# EAGLE board M_H_ext_sound (EAGLE 9.6.2)
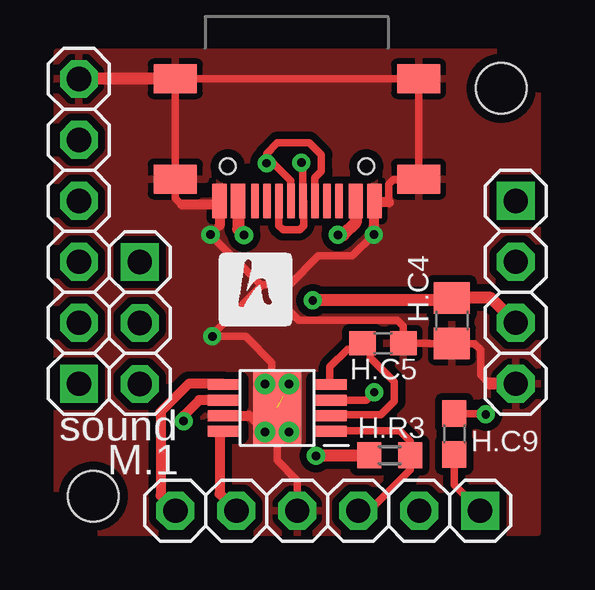
[diagram p0: board, top side]
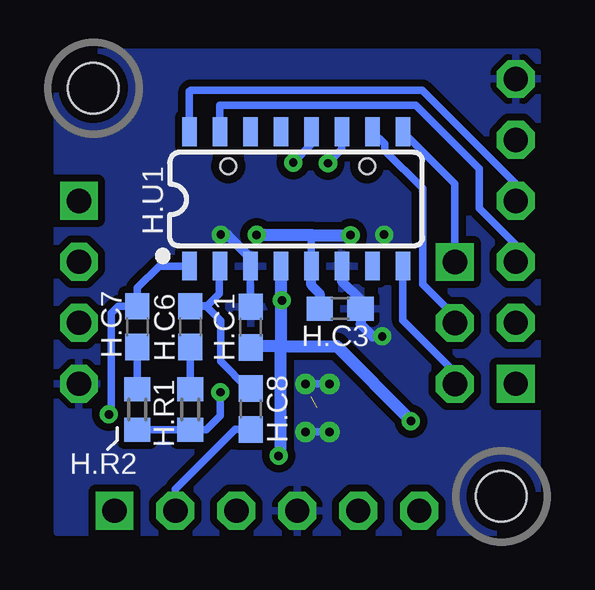
[diagram p1: board, bottom side, seen from below]

No outline drawn. Coordinates in mm, seen from the top.
Copper layers (1*16): Top 0.035mm / dielectric 1.5mm / Bottom 0.035mm
Design rules "default *": minimum track width 12mil, minimum drill 0.35mm, track to track 12mil, track to pad 12mil, pad to pad 10mil, via to via 10mil, smd to smd 10mil, copper to edge 15mil, drill to drill 15mil, minimum pad ring 10mil, minimum via ring 8mil, stop-mask expansion 4mil, vias tented up to drill 0mil, thermal gap 10mil
Holes 2.1 mm at 2,2 19,19

## Footprints (pad centres in the part's own frame; a part is rotated, then mirrored left to right if it is on the bottom)
C0603 = smd 1.1 x 1: 1 -0.85,0; 2 0.85,0
C0805 = smd 1.3 x 1.5: 1 -0.95,0; 2 0.95,0
1X06 = drill 1.016 pad 1.575 square: 1 -6.35,0 | drill 1.016 pad 1.575 octagon: 2 -3.81,0; 3 -1.27,0; 4 1.27,0; 5 3.81,0; 6 6.35,0
R0603 = smd 1 x 1.1: 1 -0.85,0; 2 0.85,0
SO16 = smd 0.6 x 1.2: 1 -4.445,-2.8; 2 -3.175,-2.8; 3 -1.905,-2.8; 4 -0.635,-2.8; 5 0.635,-2.8; 6 1.905,-2.8; 7 3.175,-2.8; 8 4.445,-2.8; 9 4.445,2.8; 10 3.175,2.8; 11 1.905,2.8; 12 0.635,2.8; 13 -0.635,2.8; 14 -1.905,2.8; 15 -3.175,2.8; 16 -4.445,2.8
MSOP-POWERPAD-8 = smd 1.4 x 0.45: 1 -2.184,0.959; 2 -2.184,0.309; 3 -2.184,-0.341; 4 -2.184,-0.991; 5 2.216,-0.991; 6 2.216,-0.341; 7 2.216,0.309; 8 2.216,0.959 | smd 2 x 3: 9 0.016,-0.016 | drill 0.35: P$10 -0.484,-1.016; P$11 0.516,-1.016; P$12 0.516,0.984; P$13 -0.484,0.984
USB-C = smd 0.6 x 1.45: A1B12 -3.235,3.825; A4B9 -2.46,3.825; B1A12 3.215,3.825; B4A9 2.44,3.825 | smd 0.3 x 1.45: A5 -1.26,3.825; A6 -0.26,3.825; A7 0.24,3.825; A8 1.24,3.825; B5 1.74,3.825; B6 0.74,3.825; B7 -0.76,3.825; B8 -1.76,3.825 | smd 1.8 x 1.2: SH1 -5.08,2.91; SH2 -5.08,-1.27; SH3 5.06,-1.27; SH4 5.06,2.91 | hole 0.65: 2.88,2.38; -2.9,2.38
1X03 = drill 1.016 pad 1.575 square: 1 -2.54,0 | drill 1.016 pad 1.575 octagon: 2 0,0; 3 2.54,0
1X04 = drill 1.016 pad 1.575 square: 1 -3.81,0 | drill 1.016 pad 1.575 octagon: 2 -1.27,0; 3 1.27,0; 4 3.81,0

## Placement (x,y rotation side)
H.C1  100n  [C0603]  12.45,9.05 90 bottom
H.C3  1u  [C0603]  8.71,9.81 0 bottom
H.C4  10u (22u)  [C0805]  16.94,9.31 90 top
H.C5  100n  [C0603]  14.07,8.38 180 top
H.C6  100n  [C0603]  14.96,9.07 270 bottom
H.C7  100n  [C0603]  17.17,9.07 270 bottom
H.C8  100n  [C0603]  12.45,5.64 270 bottom
H.C9  100n  [C0603]  17.04,4.6 270 top
H.J1  [1X06]  11.77,1.4 180 top
H.J2  [1X06]  1.4,13.04 90 top
H.R1  100k  [R0603]  14.96,5.61 270 bottom
H.R2  100k  [R0603]  17.17,5.61 270 bottom
H.R3  10k  [R0603]  14.35,3.71 180 top
H.U1  WT2003S  [SO16]  10.55,14.39 0 bottom
H.U2  TPA6211  [MSOP-POWERPAD-8]  9.68,5.66 180 top
H.USB  USB-C  [USB-C]  10.47,18.12 180 top
JP1  [1X03]  3.94,9.22 270 top
JP2  [1X04]  19.6,10.5 270 top

## Library data of the parts
H.C1 H.C3-H.C9 = rcl; SPICEPREFIX: C
H.J1 H.J2 JP1 JP2 = pinhead2
H.R1-H.R3 = rcl; SPICEPREFIX: R
H.U1 = WT2003S
H.U2 H.USB = hugo

## Nets
GND: H.C1.2 H.C3.2 H.C4.1 H.C5.1 H.J1.4 H.J2.6 H.U1.3 H.U1.6 H.U2.7 H.U2.9 H.U2.P$10 H.U2.P$11 H.U2.P$12 H.U2.P$13 H.USB.A1B12 H.USB.B1A12 H.USB.SH1 H.USB.SH2 H.USB.SH3 H.USB.SH4 JP2.4
N$1: H.C8.2 H.J1.2
N$2: H.C9.2 H.J1.1
N$3: H.J1.5 H.U2.8
N$4: H.J2.3 H.U1.15
N$5: H.J2.4 H.U1.16
N$6: H.J1.6 H.U2.5
N$7: H.J1.3 H.R3.1 H.U2.1
N$8: H.U1.10 JP1.2
N$9: H.U1.12 H.USB.A6 H.USB.B6
N$10: H.U1.11 H.USB.A7 H.USB.B7
N$11: H.C3.1 H.U1.5 H.USB.A4B9 H.USB.B4A9
N$12: H.C6.1 H.C8.1 H.U1.2
N$13: H.C7.1 H.C9.1 H.U1.1
N$14: H.R1.2 H.R2.2 H.U2.3
N$15: H.C5.2 H.U2.2 H.U2.4
N$16: H.U1.9 JP1.1
N$17: H.C6.2 H.R1.1
N$18: H.C7.2 H.R2.1
N$19: H.U1.8 JP1.3
VCC: H.C1.1 H.C4.2 H.R3.2 H.U1.4 H.U2.6 JP2.3

## Tracks (layer width: path | path; a pad name or v marks a point on that pad's centre or on a via)
GND  (via drill 0.35)  (1 unrouted)
  Top 0.305: 5.7,14.15 5.42,14.43 H.USB.SH4 H.USB.SH3 H.USB.SH2 H.USB.SH1 15.53,15.19 14.5,15.19 14.32,15.01 14.32,14.25 | v13.69,12.9 13.71,12.92 | H.J2.6 | 7.26,13.28 v6.88,12.9 8.97,10.81 9.05,10.81 | H.C4.1 17.04,8.46 17.04,8.59 | H.C4.1 16.94,8.31 | 13.65,12.9 v13.69,12.9 | v13.69,12.9 12.8,12.01 11.38,12.01 10.18,10.81 10.08,10.81 | 8.49,5.36 H.U2.P$12 9.66,5.18 H.U2.9 9.66,3.49 10.5,2.65 H.J1.4 | 9.92,6.14 9.38,6.68 H.U2.P$11 9.16,6.71 9.44,6.99 9.44,7.57 8.35,8.66 v6.96,8.66 6.96,8.73 9.05,10.81 | H.C4.1 16.03,8.36 16.01,8.38 H.C5.1 14.92,9.09 14.67,9.34 10.55,9.34 10.08,9.81 10.08,10.81 | H.C4.1 17.88,8.36 18.14,8.1 18.14,7.06 18.51,6.69 | 9.05,10.81 10.08,10.81
  Top 0.406: 5.7,14.15 7.11,14.15 H.USB.B1A12 7.26,13.28 | 14.32,14.25 13.76,14.25 H.USB.A1B12 13.71,12.92 | H.U2.7 8.49,5.36
  Top 0.508: H.USB.SH3 H.J2.6 | JP2.4 18.51,6.69
  Bottom 0.305: 12.62,9.73 H.C1.2 H.U1.3 | H.U2.P$10 H.U2.P$11 | H.U2.P$13 H.U2.P$12
  Bottom 0.406: H.U1.6 8.64,10.96 7.87,10.19 H.C3.2 7.87,9.16 7.37,8.66 v6.96,8.66 | H.U1.3 12.45,11.94 13.41,12.9 v13.69,12.9
  pour Top (isolate 0.305): 0.5,20.5 0.5,0.5 20.5,0.5 20.5,20.5
  pour Bottom (isolate 0.305): 0.5,20.5 0.5,0.5 20.5,0.5 20.5,20.5
N$1
  Bottom 0.305: H.J1.2 15.58,2.29 13.08,4.79 H.C8.2
N$2
  Top 0.305: H.C9.2 17.04,2.47 H.J1.1
N$3
  Top 0.406: H.J1.5 7.26,2.1 7.26,4.5 H.U2.8
N$4
  Bottom 0.305: H.U1.15 13.72,18.3 5.57,18.3 2.92,15.66 2.92,14 1.4,12.48 H.J2.3
N$5
  Bottom 0.305: H.U1.16 14.99,18.87 14.95,18.91 5.29,18.91 1.4,15.02 H.J2.4
N$6
  Top 0.406: H.U2.5 7.44,6.68 5.97,6.68 4.8,5.51 4.8,2.04 5.42,1.42 H.J1.6
N$7
  Top 0.305: 12.2,4.71 H.U2.1 11.89,4.73 14.76,4.73 15.2,4.29 H.R3.1 15.2,3.1 13.5,1.4 H.J1.3
N$8
  Bottom 0.305: H.U1.10 6.86,16.68 6.86,16.4 5.28,14.83 5.28,10.84 3.94,9.5 JP1.2
N$9  (via drill 0.35)
  Top 0.305: v10.67,15.9 10.73,15.9 H.USB.A6 10.76,14.27 10.76,13.28 10.59,13.11 9.91,13.11 9.73,13.28 H.USB.B6
  Bottom 0.305: H.U1.12 9.91,16.66 v10.67,15.9
N$10  (via drill 0.35)
  Top 0.305: H.USB.A7 10.23,15.14 9.5,15.88 v9.22,15.88 9.22,16.28 9.68,16.74 10.99,16.74 11.5,16.23 11.5,15.55 11.23,15.28 H.USB.B7
  Bottom 0.305: v9.22,15.88 8.64,16.45 H.U1.11
N$11  (via drill 0.35)
  Top 0.508: H.USB.A4B9 12.94,13.4 12.42,12.89 v12.19,12.89 | H.USB.B4A9 8.04,13.13 v8.28,12.88
  Bottom 0.305: 9.91,11.92 H.U1.5 9.91,12.85 | 9.91,12.85 9.88,12.88 | 9.96,12.89 9.91,12.85
  Bottom 0.406: H.U1.5 9.91,10.79 9.56,10.45 H.C3.1
  Bottom 0.508: v12.19,12.89 10.55,12.89 9.96,12.89 | 9.88,12.88 v8.28,12.88
N$12
  Bottom 0.305: H.U1.2 13.75,11.57 13.75,10.45 14.25,9.94 14.48,9.94 14.45,9.92 | H.C8.1 12.57,6.49 13.7,7.62 13.7,9.32 14.3,9.92 14.45,9.92 | H.C6.1 14.45,9.92
N$13  (via drill 0.35)
  Top 0.305: v18.35,5.41 18.35,5.45 H.C9.1
  Bottom 0.305: H.C7.1 17.17,10.68 16.26,11.59 H.U1.1 | H.C7.1 17.17,9.78 | H.C7.1 17.95,9.92 18.25,9.62 18.25,5.41 v18.35,5.41
N$14  (via drill 0.35)
  Top 0.305: v13.71,6.33 13.38,6 H.U2.3
  Bottom 0.305: H.R2.2 H.R1.2 14.3,4.76 13.71,5.36 v13.71,6.33
N$15
  Top 0.305: H.U2.4 11.86,7.39 12.6,8.13 12.97,8.13 H.C5.2 | H.U2.2 11.9,5.4 13.98,5.4 14.54,5.96 14.54,6.76 13.53,7.77 13.53,8.36 13.25,8.36 H.C5.2 | 13.22,8.05 H.C5.2
N$16
  Bottom 0.305: H.U1.9 3.94,15.03 JP1.1
N$17
  Bottom 0.305: H.C6.2 H.R1.1
N$18
  Bottom 0.305: H.C7.2 H.R2.1
N$19
  Bottom 0.305: H.U1.8 6.1,9.32 3.94,7.16 JP1.3
VCC  (via drill 0.35)
  Top 0.305: H.R3.2 13.61,3.71
  Top 0.406: H.U2.6 6.41,6 5.77,5.36 v5.77,5.13
  Top 0.508: JP2.3 18.57,10.26 H.C4.2 16.84,10.16 v11.14,10.16 | 13.61,3.71 13.59,3.68 v11.28,3.68
  Bottom 0.305: 11.26,8.25 12.4,8.25 H.C1.1
  Bottom 0.508: H.U1.4 11.18,10.32 11.14,10.29 v11.14,10.16 | 11.12,10.13 v11.14,10.16 | v5.77,5.13 5.77,5.16 8.87,8.26 11.2,8.26 | v11.28,3.68 11.28,3.83 11.2,3.91 11.2,8.26 | v11.14,10.16 11.2,10.11 11.2,8.26 | 11.28,8.23 11.26,8.25 | 11.2,8.26 | 11.2,8.26 12.39,8.26 H.C1.1

## Text on the board
tPlace: sound / M.1